# Altium PCB PCB_TEST_ADAPTER.PcbDoc (part 2 of 2)
Units mil, origin at the board's own origin, x right, y up, seen from the top; angles counter-clockwise.
Board outline 9448.82 x 5511.81 mil, 4 copper layers (Top Layer, Internal Plane 1, Internal Plane 2, Bottom Layer), stack 30.635 mil thick; 309 components, 242 nets, 1237 pads, 252 vias.
Unrouted connection lines stored in the file: 662.
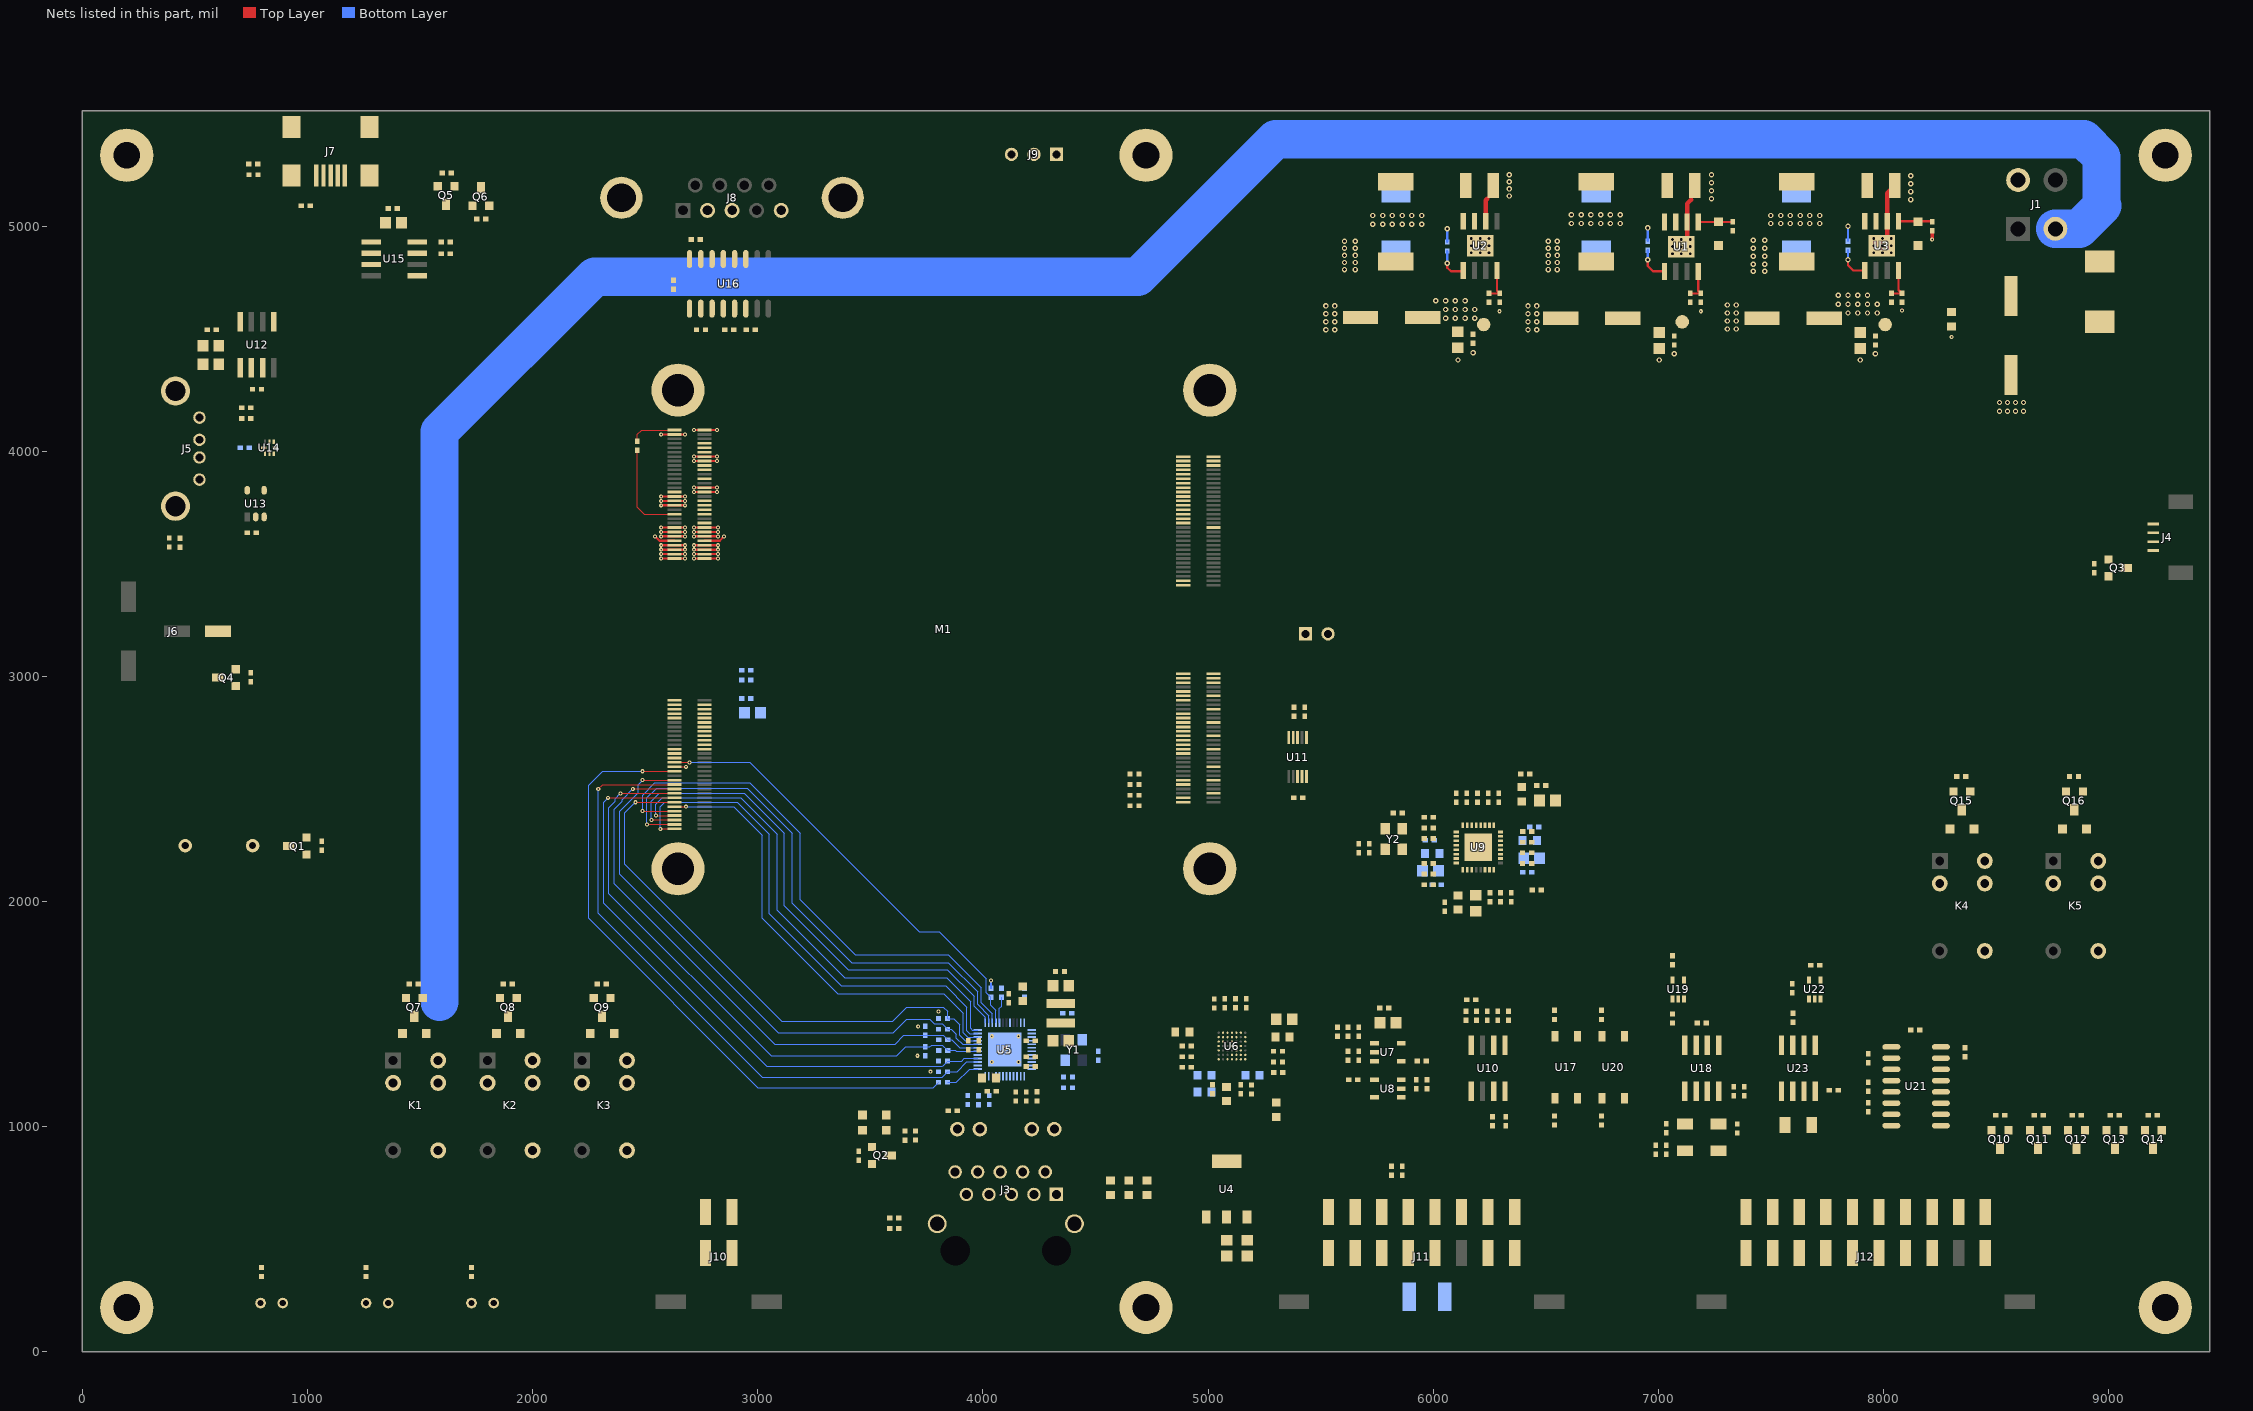
[diagram p4: the nets of this part, all layers, seen from the top]

## Part data
C1 C5 C11 C18: library part "CAP WP"
C2 C3 C4 C6 C7 C8 C9 C10 C12 C13 C14 C15 C16 C17 C19 C21 C22 C23 C24 C25 C26 C27 C28 C29 C30 C31 C32 C33 C34 C35 C36 C37 C38 C39 C40 C41 C42 C43 C44 C45 C46 C47 C48 C49 C50 C51 C52 C53 C54 C55 C56 C57 C58 C59 C60 C61 C62 C63 C64 C65 C66 C67 C68 C69 C70 C73 C75 C76 C77 C78 C79 C80 C81: library part Cap, "Capacitor"
C20 C82 C85 C86 C87: library part CAP_Dup1
C71 C72 C74 C88 C89 C90 C91 C92 C99 C102 C103 C104 C105: library part CAP
C93 C94 C95 C96 C97 C98 C100 C101 C106: library part "P_CAP NP"
D1 D2 D3 D4 D5 D6 D10 D11 D12 D13 D14 D15 D16: library part "Diode 11DQ03", "Schottky Rectifier"
D7 D8 D9: library part LN01401_1
J1 J4 J10: library part "Header 4", "Header, 4-Pin"
J2 J6: library part "Header 2", "Header, 2-Pin"
J5: library part "Header 6", "Header, 6-Pin"
J7: library part FOX_UH51543-JS7
J8: library part "D Connector 9", "Receptacle Assembly, 9 Position, Right Angle"
J9: library part "Header 3", "Header, 3-Pin"
J11: library part "Header 8X2", "Header, 8-Pin, Dual row"
J12: "Header, 10-Pin, Dual row"
K1 K2 K3 K4 K5: library part G5V-1_0
L1 L2 L3: library part 4.7UH_CDH2D09BNP-4R7MC_0.7A_20%
L4 L6 L7 L8 L9 L10 L11 L12: library part Inductor, "Inductor"
L5: library part INDUCTOR, "IND PWR 4.7UH@1MHZ 1A 20% SMD"
Q1 Q2 Q3 Q4 Q6 Q7 Q8 Q9 Q10 Q11 Q12 Q13 Q14 Q15 Q16: library part MOSFET-N, "N-Channel MOSFET"
Q5: library part AO3401L_SOT23-3_0
R1 R2 R3 R4 R5 R6 R7 R8 R9 R17 R19 R21 R22 R55 R91 R98 R99 R100 R101 R102 R108 R109 R112 R113 R114 R115 R116 R117 R118 R120: library part Res3, "Resistor"
R10 R11 R14 R15 R16 R18 R20 R24 R25 R26 R27 R28 R29 R30 R31 R32 R33 R34 R35 R36 R37 R38 R39 R40 R41 R42 R43 R44 R45 R46 R47 R48 R49 R50 R51 R52 R53 R54 R56 R57 R58 R59 R60 R61 R62 R63 R64 R65 R66 R67 R68 R71 R72 R73 R75 R77 R78 R79 R80 R81 R82 R83 R84 R85 R86 R87 R88 R90 R92 R93 R94 R95 R96 R97 R119 R121: library part CR16-1003FM
R69 R70 R74 R76 R110 R111: library part R
R103 R104 R105 R106 R107: library part P_R
U1 U2 U3: library part LM22670_0
U4: library part LD1117AS18, "IC VREG LDO 1.8V 1A 10V SOT-223"
U5: library part AR8031_QFN48, "IC XCVR ETHERNET PHY 10/100/1000G-BIT 3.3V QFN48"
U6: library part WM8962_BGA_49P_CUST, "IC AUDIO CODEC 24BIT DAC 2 CH ADC 1.8V BGA49"
U7 U8: "Single 30V High Output Current and Unlimited Capacitive Load Op Amp"
U12 U15: library part MIC2526_8P, "IC LIN SW PWR ACTIVE HIGH DUAL 2.7V-5.5V 0.5A SOIC8"
U13: library part 74LVC1G04GW_SOT353-5
U16 U21: library part MAX3232
U17 U20: library part Optoisolator1, "4-Pin Phototransistor Optocoupler"
U18: library part TJA1040T_SO_8P, "IC XCVR CAN HS 5V SO8"
U23: library part MAX485
Y1: library part XTAL_13Y, "XTAL 25MHZ -- -- SMT"
Y2: library part CRYSTAL_JXS63, "XTAL 28.63636MHZ 10PF RSN -- SMT"

## Free pads (board coordinates)
  round 236.22 hole 118.11: MT1(196.85,5314.96) MT2(4724.41,5314.96) MT3(9251.97,5314.96) MT4(9251.97,196.85) MT5(4724.41,196.85) MT6(196.85,196.85)
  round 60 smd paste-30: ""(6224.41,4562.99) ""(7106.3,4574.8) ""(8007.87,4562.99)

## Via types
v1: diameter 24, hole 12, Top Layer to Bottom Layer, tented both sides, 174 vias
v2: diameter 18, hole 8, Top Layer to Bottom Layer, tented both sides, 78 vias

## Nets (pads, with @x,y where several pads share a name; then routed paths per layer and width w, separated by ;. In a path a pad name is that pad's centre, name@x,y a point inside that pad or via, vN(x,y) a via of type N, cw(c..) or ccw(c..) an arc to the next point about the centre after c; other vN are vias at no path point)
2V5-RGMII: C23.1 R38.2 R39.2 U5.10
12V-DET: J11.8 R87.2 R120.1
ACC-INPUT: J10.4 K3.6
ADV7390-RST: M1.B30 U9.14
AGND1: C40.1 C41.2 C46.1 C48.1 C49.1 C55.1 C56.1 C57.1 J4.4 J11.2 J11.4 J11.6 L8.2 R51.2 R52.2 R54.1 U6.B1 U6.B4 U6.C1 U6.C7 U6.D7 U7.5 U8.5
AUD3-RXD: M1.D27 R59.2
AUD3-TXC: M1.D21 R56.2
AUD3-TXD: M1.D23 R58.2
AUD3-TXFS: M1.D25 R57.2
AUD-AUX-OUT1: C52.2 J11.3
AUD-AUX-OUT2: C53.2 J11.5
AUD-MAIN-OUT: C51.2 J11.1
AUD-MCLK: M1.D32 R60.2
AUD-TST-OUT: C44.1 J4.3 J11.9
BELL: M1.D37 Q1.2 R21.1
BM-SEL: J2.1 M1.B2
CAMERA1: J11.7 R76.2
CAMERA2: J11.11 R74.2
CAN-RX: M1.A50 U19.4
CAN-STBY: M1.A52 R106.1
CAN-TX: M1.A48 U18.1
CAN_N: C97.1 J12.4 R105.2 U18.6
CAN_P: C93.2 J12.2 R103.1 U18.7
CLK: U9.13 Y2.3
CPU-3V3: C10.2 C11.1 C12.2 L2.2 M1.D1 M1.D2 M1.D3 M1.D4 M1.D5 M1.D6 M1.D7 M1.D8 pad.@6224.41,4562.99 R4.2 | length 850.4
  Top Layer w10: v2(2570.87,3523.62) M1.D2@2629.92,3523.62 v2(2677.17,3523.62) ; v2(2570.87,3543.31) M1.D4@2629.92,3543.31 v2(2677.17,3543.31) ; v2(2570.87,3562.99) M1.D6@2629.92,3562.99 v2(2677.17,3562.99) ; v2(2570.87,3582.68) M1.D8@2629.92,3582.68 v2(2677.17,3582.68) ; v2(2716.54,3523.62) M1.D1@2763.78,3523.62 v2(2822.83,3523.62) ; v2(2716.54,3543.31) M1.D3@2763.78,3543.31 v2(2822.83,3543.31) ; v2(2716.54,3562.99) M1.D5@2763.78,3562.99 v2(2822.83,3562.99) ; v2(2716.54,3582.68) M1.D7@2763.78,3582.68 v2(2822.83,3582.68)
  other v1: 6055.12,4590.55 6098.43,4590.55 6141.73,4590.55 6185.04,4590.55 6055.12,4629.92 6098.43,4629.92 6141.73,4629.92 6185.04,4629.92 6011.81,4669.29 6055.12,4669.29 6098.43,4669.29 6141.73,4669.29
DVDDL-RGMII: C26.1 C27.1 L5.2 L6.1 R25.2 U5.47
ENET-REF-CLK: M1.C28 R33.1 | length 2874.5
  Top Layer w4.7: v2(2488.19,2578.74) M1.C28@2629.92,2578.74
  Bottom Layer w4.7: v2(2488.19,2578.74) 2311.02,2578.74 2248.03,2515.75 2248.03,1925.2 3000,1173.23 3779.09,1173.23 R33.1@3802.71,1196.85
ETH-SH-GND: C37.2 J3.SH1 J3.SH2 R32.1
ETH-VDDIO-REG: C21.1 C22.1 M1.C37 R36.2 R37.2 U5.29
ETH-WOL-INT: M1.C32 R27.1 U5.40 | length 1996.4
  Top Layer w4.7: M1.C32@2629.92,2618.11 v2(2696.85,2618.11)
  Bottom Layer w4.7: v2(2696.85,2618.11) 2964.57,2618.11 3716.54,1866.14 3807.09,1866.14 4015.75,1657.48 4015.75,1594.05 R27.1@4035.43,1574.36 4035.43,1539.37 4057.58,1517.23 U5.40@4057.58,1462.11
ETH_AVDDL: C30.1 C31.1 C32.1 C33.1 L6.2 U5.8 U5.13 U5.19 U5.44
GND: C1.2 C2.2 C4.2 C5.2 C6.1 C7.1 C9.2 C10.1 C11.2 C12.1 C14.2 C15.2 C16.2 C17.1 C18.2 C19.1 C20.2 C21.2 C22.2 C23.2 C24.2 C25.2 C26.2 C27.2 C28.2 C29.2 C30.2 C31.2 C32.2 C33.2 C34.2 C35.2 C36.2 C37.1 C38.2 C39.2 C42.1 C47.1 C50.1 C58.2 C59.2 C60.2 C61.2 C63.2 C64.2 C65.2 C68.2 C69.2 C76.2 C77.2 C78.2 C79.2 C80.2 C81.2 C82.1 C85.1 C86.2 C87.2 C88.2 C90.2 C91.2 C93.1 C94.2 C95.2 C96.2 C97.2 C98.2 C99.2 C100.2 C101.2 C103.2 C104.2 C106.1 D2.1 D4.1 D5.1 J1.2 J2.2 J3.1 J3.14 J4.2 J5.4 J7.5 J8.5 J8.10 J8.11 J9.3 J10.1 J11.16 J12.9 J12.10 J12.16 J12.20 L8.1 M1.A5 M1.A11 M1.A17 M1.A25 M1.A31 M1.A37 M1.A43 M1.A49 M1.A55 M1.A56 M1.A57 M1.A58 M1.A59 M1.A60 M1.B27 M1.B55 M1.B56 M1.B57 M1.B58 M1.B59 M1.B60 M1.C47 M1.C52 M1.C53 M1.C54 M1.C56 M1.D26 M1.D28 M1.D30 M1.D31 M1.D33 M1.D45 M1.D47 M1.D58 M1.D59 M1.MT7 M1.MT8 M1.MT9 M1.MT10 pad.MT1 pad.MT2 pad.MT3 pad.MT4 pad.MT5 pad.MT6 Q1.3 Q2.3 Q3.3 Q4.3 Q6.3 Q7.3 Q8.3 Q9.3 Q10.3 Q11.3 Q12.3 Q13.3 Q14.3 Q15.3 Q16.3 R1.2 R3.2 R5.2 R6.2 R8.2 R18.2 R21.2 R32.2 R34.1 R35.1 R40.1 R41.1 R42.1 R43.1 R44.1 R45.1 R46.1 R47.1 R55.2 R61.2 R62.2 R64.2 R65.2 R66.2 R67.2 R68.2 R71.2 R77.2 R81.1 R82.2 R84.2 R86.1 R88.2 R90.2 R91.2 R93.1 R95.2 R97.1 R98.2 R99.2 R100.2 R107.2 R111.2 R112.2 R113.2 R114.2 R115.2 R116.2 R117.2 R118.2 R119.2 R120.2 U1.6 U1.9 U2.6 U2.9 U3.6 U3.9 U4.1 U5.49 U6.F2 U6.F3 U6.G5 U9.6 U9.15 U9.29 U9.32 U11.3 U12.1 U12.6 U13.3 U14.4 U15.1 U15.6 U16.15 U17.3 U18.2 U19.3 U20.3 U21.15 U22.3 U23.5 Y2.2 | length 1599.2
  Top Layer w10: v2@2570.87,3759.84 M1.D26@2629.92,3759.84 v2@2677.16,3759.84 ; v2(2570.87,3779.53) M1.D28@2629.92,3779.53 v2(2677.17,3779.53) ; v2(2570.87,3799.21) M1.D30@2629.92,3799.21 v2(2677.17,3799.21) ; v2(2570.87,4074.8) M1.D58@2629.92,4074.8 v2(2677.17,4074.8) ; v2(2716.54,3818.9) M1.D31@2763.78,3818.9 v2(2818.9,3818.9) ; v2(2716.54,3838.58) M1.D33@2763.78,3838.58 v2(2818.9,3838.58) ; v2(2716.54,3956.69) M1.D45@2763.78,3956.69 v2(2818.9,3956.69) ; v2(2716.54,3976.38) M1.D47@2763.78,3976.38 v2(2818.9,3976.38) ; v2(2716.54,4094.49) M1.D59@2763.78,4094.49 v2(2818.9,4094.49)
  Top Layer w15: v2(8216.54,4940.94) R8.2@8216.54,4980.13
  Top Layer w20: U2.6@6233.86,5022.05 6233.86,5115.75 6240.16,5122.05 ; v1(7102.36,4908.66) 7127.56,4933.86 U1.6@7127.56,5018.11 7127.56,5100 7145.67,5118.11 ; U3.9@7992.13,4912.6 8017.32,4937.8 U3.6@8017.32,5022.05 8017.32,5147.24 C14.2@8051.18,5181.1
  other v1: 8515.75,4177.17 8551.18,4177.17 8586.61,4177.17 8622.05,4177.17 8515.75,4216.54 8551.18,4216.54 8586.61,4216.54 8622.05,4216.54 6110.24,4405.51 7003.94,4405.51 7897.64,4405.51 7070.87,4433.07 7964.57,4433.07 6177.17,4437.01 5523.62,4539.37 5562.99,4539.37 6421.26,4539.37 6460.63,4539.37 7307.09,4543.31 7346.46,4543.31 5523.62,4574.8 5562.99,4574.8 6421.26,4574.8 6460.63,4574.8 7307.09,4578.74 7346.46,4578.74 5523.62,4610.24 5562.99,4610.24 6421.26,4610.24 6460.63,4610.24 7307.09,4614.17 7346.46,4614.17 5523.62,4645.67 5562.99,4645.67 6421.26,4645.67 6460.63,4645.67 7307.09,4649.61 7346.46,4649.61 7421.26,4799.21 7472.44,4799.21 5606.3,4807.09 5653.54,4807.09 6511.81,4807.09 6551.18,4807.09 7421.26,4830.71 7472.44,4830.71 5606.3,4838.58 5653.54,4838.58 6511.81,4838.58 6551.18,4838.58 7421.26,4866.14 7472.44,4866.14 5606.3,4870.08 5653.54,4870.08 6511.81,4870.08 6551.18,4870.08 7062.99,4877.95 7102.36,4877.95 7141.73,4877.95 6169.29,4881.89 6208.66,4881.89 6248.03,4881.89 7956.69,4881.89 7996.06,4881.89 8035.43,4881.89 5606.3,4901.57 5653.54,4901.57 6511.81,4901.57 6551.18,4901.57 7421.26,4901.57 7472.44,4901.57 7062.99,4909.45 7141.73,4909.45 6208.66,4912.6 6169.29,4913.39 6248.03,4913.39 7956.69,4913.39 7996.06,4913.39 8035.43,4913.39 5606.3,4933.07 5653.54,4933.07 6511.81,4933.07 6551.18,4933.07 7421.26,4937.01 7472.44,4937.01 7062.99,4940.94 7102.36,4940.94 7141.73,4940.94 6169.29,4944.88 6208.66,4944.88 6248.03,4944.88 7956.69,4944.88 7996.06,4944.88 8035.43,4944.88 8122.05,5118.11 7236.22,5122.05 6338.58,5133.86 8122.05,5153.54 7236.22,5157.48 6338.58,5165.35 8122.05,5188.98 7236.22,5192.91 6338.58,5196.85 8122.05,5224.41 6338.58,5228.35 7236.22,5228.35
  other v2: 3767.72,1244.09 4039.37,1287.4 4157.48,1287.4 3708.66,1314.96 4098.43,1346.46 4039.37,1401.57 4157.48,1401.57 3712.6,1444.88 3803.15,1511.81 2570.87,3759.84 2677.17,3759.84 8303.15,4507.87 6295.28,4622.05 7188.98,4622.05 8082.68,4625.98
HOST-VBUS: C79.1 C80.1 J5.1 R85.2 R119.1 U12.5
I2C1-SCL: M1.A4 R11.1 U6.F1 U9.12
I2C1-SDA: M1.A2 R10.1 U6.E2 U9.11
I2C2-SCL: M1.A12 R15.1 U11.10
I2C2-SDA: M1.A10 R14.1 U11.9
LED1: D7.2 M1.B50
LED2: D8.2 M1.B52
LED3: D9.2 M1.B54
LINK-LED: J3.12 Q2.1
MAINPWR: C1.1 C2.1 C4.1 C9.1 C14.1 D1.2 U1.7 U2.7 U3.7
MR: J4.1 Q3.1
NetC3_1: C3.1 D2.2 L1.1 U1.8 | length 58.6
  Bottom Layer w10: C3.1@6952.76,4933.51 v1(6952.76,4992.13)
  other v1: 6614.17,5011.81 6657.48,5011.81 6700.79,5011.81 6744.09,5011.81 6787.4,5011.81 6830.71,5011.81 6614.17,5051.18 6657.48,5051.18 6700.79,5051.18 6744.09,5051.18 6787.4,5051.18 6830.71,5051.18
NetC3_2: C3.2 U1.1 | length 155.3
  Top Layer w10: v1(6952.76,4850.39) 6952.76,4822.83 6976.38,4799.21 U1.1@7027.56,4799.21
  Bottom Layer w10: v1(6952.76,4850.39) C3.2@6952.76,4893.51
NetC8_1: C8.1 D4.2 L2.1 U2.8 | length 58.6
  Bottom Layer w10: C8.1@6062.99,4929.57 v1(6062.99,4988.19)
  other v1: 5732.28,5007.87 5775.59,5007.87 5818.9,5007.87 5862.2,5007.87 5905.51,5007.87 5948.82,5007.87 5732.28,5047.24 5775.59,5047.24 5818.9,5047.24 5862.2,5047.24 5905.51,5047.24 5948.82,5047.24
NetC8_2: C8.2 U2.1 | length 153.6
  Top Layer w10: v1(6062.99,4834.65) 6062.99,4814.96 6078.74,4799.21 6129.92,4799.21 U2.1@6133.86,4803.15
  Bottom Layer w10: v1(6062.99,4834.65) C8.2@6062.99,4889.57
NetC13_1: C13.1 D5.2 L3.1 U3.8 | length 66.5
  Bottom Layer w10: C13.1@7842.52,4933.51 v1(7842.52,5000)
  other v1: 7500,5011.81 7543.31,5011.81 7586.61,5011.81 7629.92,5011.81 7673.23,5011.81 7716.54,5011.81 7500,5047.24 7543.31,5047.24 7586.61,5047.24 7629.92,5047.24 7673.23,5047.24 7716.54,5047.24
NetC13_2: C13.2 U3.1 | length 151.3
  Top Layer w10: v1(7842.52,4850.39) 7842.52,4826.77 7866.14,4803.15 U3.1@7917.32,4803.15
  Bottom Layer w10: v1(7842.52,4850.39) C13.2@7842.52,4893.51
NetC24_1: C24.1 C25.1 L4.2 U5.16
NetC34_1: C34.1 C35.1 C36.1 J3.6
NetC38_1: C38.1 U5.6 Y1.1
NetC39_1: C39.1 U5.7 Y1.3
NetC41_1: C41.1 R48.1 R53.1 U7.2 U8.2
NetC43_1: C43.1 R49.1
NetC43_2: C43.2 C45.2 R51.1 U6.B5
NetC44_2: C44.2 U7.1 U7.4
NetC45_1: C45.1 R52.1
NetC48_2: C48.2 L7.2 U6.D6
NetC51_1: C51.1 U6.C4
NetC52_1: C52.1 U6.D4
NetC53_1: C53.1 U6.E7
NetC54_1: C54.1 U6.B7
NetC54_2: C54.2 U6.B6
NetC55_2: C55.2 U6.A6
NetC56_2: C56.2 U6.A7
NetC57_2: C57.2 U6.C5
NetC70_2: C70.2 U9.23
NetC71_1: C71.1 C72.1 R72.2 U9.22
NetC71_2: C71.2 R70.1 U10.1
NetC72_2: C72.2 R69.1 U10.2
NetC73_1: C73.1 C75.1 U9.16
NetC75_2: C75.2 R78.2
NetC89_1: C89.1 U16.1
NetC89_2: C89.2 U16.3
NetC90_1: C90.1 U16.2
NetC91_1: C91.1 U16.6
NetC92_1: C92.1 U16.4
NetC92_2: C92.2 U16.5
NetC98_1: C98.1 R103.2 R104.1 R105.1
NetC102_1: C102.1 U21.1
NetC102_2: C102.2 U21.3
NetC103_1: C103.1 U21.2
NetC104_1: C104.1 U21.6
NetC105_1: C105.1 U21.4
NetC105_2: C105.2 U21.5
NetD3_2: D3.2 R5.1 U1.5 | length 154
  Top Layer w10: U1.5@7177.56,5018.11 7328.69,5018.11 R5.1@7330.71,5020.13
NetD6_2: D6.2 R8.1 U3.5 | length 150
  Top Layer w10: U3.5@8067.32,5022.05 8214.61,5022.05 R8.1@8216.54,5020.13
NetD7_1: D7.1 R17.2
NetD8_1: D8.1 R19.2
NetD9_1: D9.1 R22.2
NetD10_2: D10.2 D11.2 Q2.2 R34.2
NetD12_1: D12.1 K1.2 Q7.1
NetD13_1: D13.1 K2.2 Q8.1
NetD14_1: D14.1 K3.2 Q9.1
NetD15_1: D15.1 K4.2 Q15.1
NetD16_1: D16.1 K5.2 Q16.1
NetJ3_11: J3.11 R26.2
NetJ3_13: J3.13 R24.2
NetJ6_1: J6.1 Q4.1
NetL5_1: L5.1 U5.3
NetLS1_2: LS1.2 Q1.1
NetQ4_2: Q4.2 R91.1
NetQ5_1: Q5.1 Q6.1 R92.1
NetR1_1: R1.1 R2.1 U1.4 | length 150
  Top Layer w10: R2.1@7141.73,4701.23 R1.1@7188.98,4701.23 7177.56,4712.65 U1.4@7177.56,4799.21
NetR3_1: R3.1 R4.1 U2.4 | length 153.9
  Top Layer w10: R4.1@6248.03,4701.23 R3.1@6295.28,4701.23 6283.86,4712.65 U2.4@6283.86,4803.15
NetR6_1: R6.1 R7.1 U3.4 | length 155.5
  Top Layer w10: R7.1@8035.43,4701.23 R6.1@8082.68,4701.23 8067.32,4716.58 U3.4@8067.32,4803.15
NetR25_1: R25.1 U5.41 | length 116.1
  Bottom Layer w4.7: U5.41@4073.33,1462.11 4073.33,1526.08 4082.68,1535.43 R25.1@4082.68,1574.36
NetR29_1: R29.1 R31.2 U5.2
NetR33_2: R33.2 U5.25 | length 159.1
  Bottom Layer w4.7: R33.2@3842.71,1196.85 3881.89,1196.85 3940.95,1255.91 U5.25@3977.36,1255.91
NetR35_2: R35.2 U5.9
NetR49_2: R49.2 R50.2 U7.3
NetR50_1: R50.1 U8.1 U8.4
NetR53_2: R53.2 R54.2 U8.3
NetR56_1: R56.1 U6.E1
NetR57_1: R57.1 U6.D3
NetR58_1: R58.1 U6.D1
NetR59_1: R59.1 U6.D2
NetR60_1: R60.1 U6.G7
NetR61_1: R61.1 U9.30
NetR62_1: R62.1 U9.31
NetR63_1: R63.1 U9.24
NetR64_1: R64.1 U9.2
NetR65_1: R65.1 U9.3
NetR66_1: R66.1 U9.4
NetR67_1: R67.1 U9.7
NetR68_1: R68.1 U9.8
NetR71_1: R71.1 U9.9
NetR73_1: R73.1 U9.27
NetR74_1: R74.1 U10.8
NetR75_1: R75.1 U9.26
NetR76_1: R76.1 U10.7
NetR77_1: R77.1 R79.1 U9.10
NetR80_2: R80.2 R81.2 Y2.1
NetR83_1: R83.1 R84.1 U11.1
NetR85_1: R85.1 R86.2 U11.4
NetR87_1: R87.1 R88.1 U11.5
NetR101_2: R101.2 U17.1
NetR104_2: R104.2 U18.5
NetR106_2: R106.2 R107.1 U18.8
NetR108_2: R108.2 U20.1
NetU13_4: U13.4 U14.1
NetU18_4: U18.4 U19.2
NetU22_2: U22.2 U23.1
OTG-ID: J7.4 M1.C43 R94.2
OTG-OC: M1.C41 R96.1 U15.3
OTG-PWREN: M1.C39 R97.2 U15.4
OTG-SH-GND: C85.2 J7.6 J7.7 J7.8 J7.9 R95.1
OTG_N: J7.2 M1.C49
OTG_P: J7.3 M1.C51
OTGVBUS: C86.1 C87.1 J7.1 Q5.2 R92.2 U15.5
P1V8: C15.1 C47.2 C49.2 C50.2 C60.1 C68.1 L7.1 L10.1 L12.1 U4.2 U4.4 U6.C6 U6.G2 U6.G4
P2V8-OUT: D3.1 D6.1 M1.D17
P3V3: C16.1 C17.2 C18.1 C19.2 C28.1 C29.1 C42.2 C46.2 C58.1 C66.1 C76.1 C77.1 C81.1 C88.1 C96.1 C99.1 C101.1 L3.2 L4.1 L9.1 L11.1 M1.D9 M1.D10 M1.D11 M1.D12 M1.D13 M1.D14 M1.D15 M1.D16 pad.@8007.87,4562.99 Q6.2 R7.2 R10.2 R11.2 R14.2 R15.2 R16.2 R17.1 R19.1 R22.1 R26.1 R27.2 R28.2 R29.2 R30.2 R48.2 R73.2 R75.2 R79.2 R80.1 R83.2 R93.2 R94.1 R96.2 R101.1 R102.1 R108.1 R109.1 R121.1 U4.3 U5.4 U6.A3 U6.G3 U11.8 U13.5 U14.8 U16.16 U19.5 U21.16 U22.5 Y2.4 | length 862.6
  Top Layer w10: v2(2543.31,3622.05) 2562.99,3602.36 M1.D10@2629.92,3602.36 ; v2(2570.87,3622.05) M1.D12@2629.92,3622.05 v2(2677.17,3622.05) ; v2(2570.87,3641.73) M1.D14@2629.92,3641.73 v2(2677.17,3641.73) ; v2(2570.87,3661.42) M1.D16@2629.92,3661.42 v2(2677.17,3661.42) ; v2(2716.54,3622.05) M1.D11@2763.78,3622.05 v2(2822.83,3622.05) ; v2(2716.54,3641.73) M1.D13@2763.78,3641.73 v2(2822.83,3641.73) ; v2(2716.54,3661.42) M1.D15@2763.78,3661.42 v2(2822.83,3661.42) ; M1.D9@2763.78,3602.36 2830.71,3602.36 v2(2850.39,3622.05)
  Bottom Layer w10: R27.2@4035.43,1614.36 v2(4035.43,1649.61)
  other v1: 7842.52,4614.17 7885.83,4614.17 7929.13,4614.17 7972.44,4614.17 7799.21,4653.54 7842.52,4653.54 7885.83,4653.54 7929.13,4653.54 7972.44,4653.54 7799.21,4692.91 7842.52,4692.91 7885.83,4692.91 7929.13,4692.91
P5V0: C5.1 C6.2 C7.2 C40.2 C78.1 C94.1 C95.1 C100.1 C106.2 D12.2 D13.2 D14.2 D15.2 D16.2 K1.9 K2.9 K3.9 K4.9 K5.9 L1.2 LS1.1 pad.@7106.3,4574.8 R2.2 R20.2 U6.A2 U6.C2 U12.7 U15.7 U18.3 U19.1 U22.1 U23.8
PB1: J12.11 Q10.1
PB2: J12.13 Q11.1
PB3: J12.15 Q12.1
PB4: J12.17 Q13.1
PB5: J12.19 Q14.1
PB-TEST-1: M1.D41 Q10.2 R112.1
PB-TEST-2: M1.D51 Q11.2 R113.1
PB-TEST-3: M1.D43 Q12.2 R114.1
PB-TEST-4: M1.D53 Q13.2 R115.1
PB-TEST-5: M1.D49 Q14.2 R116.1
PMIC-ON-REQ: M1.D22 R9.2 | length 430.2
  Top Layer w4.7: R9.2@2464.57,4003.75 2464.57,3751.97 2496.06,3720.47 M1.D22@2629.92,3720.47
PMIC-PWRON: M1.D60 R9.1 | length 204.6
  Top Layer w4.7: R9.1@2464.57,4043.75 2464.57,4074.8 2484.25,4094.49 M1.D60@2629.92,4094.49
PVDD: C61.1 C65.1 C73.2 L10.2 R78.1 U9.17
PWRIN: D1.1 J1.3 K1.10 K2.10 K3.10 K4.10 K5.10 | length 10953.4
  Bottom Layer w170: 1586.61,1555.12 1586.61,4086.61 2275.59,4775.59 4688.98,4775.59 5299.21,5385.83 8889.76,5385.83 8968.5,5307.09 8968.5,5094.49 8972.44,5090.55 8870.08,4988.19 J1.3@8763.78,4988.19
RESET-TEST: M1.B48 Q3.2 R55.1
REV-SIG: J10.3 K2.6
RGMII-INT: M1.C34 R28.1 U5.5
RGMII-LED-10-100: D10.1 U5.26
RGMII-LED-1000: D11.1 R38.1 R46.2 U5.24
RGMII-LED-ACT: R24.1 R39.1 R47.2 U5.23
RGMII-MDC: M1.C36 U5.1
RGMII-MDIO: M1.C38 R30.1 U5.48
RGMII-NRST: M1.C30 R31.1 | length 51.2
  Top Layer w4.7: M1.C30@2629.92,2598.43 v2(2681.1,2598.43)
RGMII-RXCLK: M1.C14 R44.2 U5.33 | length 2459
  Top Layer w4.7: v2(2456.69,2440.94) M1.C14@2629.92,2440.95
  Bottom Layer w4.7: v2(2456.69,2440.94) 2409.45,2393.7 2409.45,2165.35 3106.3,1468.5 3598.43,1468.5 3661.42,1531.5 3822.83,1531.5 3842.71,1511.62 R44.2@3842.71,1480.32 3870.08,1480.32 3897.64,1452.76 3897.64,1405.51 3921.26,1381.89 U5.33@3977.36,1381.89
RGMII-RXD0: M1.C20 R36.1 R40.2 U5.31 | length 2589.8
  Top Layer w4.7: v2(2444.88,2500) M1.C20@2629.92,2500
  Bottom Layer w4.7: v2(2444.88,2500) 2397.64,2452.76 2397.64,2444.88 2362.2,2409.45 2362.2,2078.74 3074.8,1366.14 3610.24,1366.14 3649.42,1405.32 R40.2@3744.09,1405.32 3823.46,1405.32 R36.1@3842.96,1385.83 3862.2,1385.83 3897.64,1350.39 U5.31@3977.36,1350.39
RGMII-RXD1: M1.C18 R37.1 R41.2 U5.30 | length 2674.4
  Top Layer w4.7: v2(2389.76,2480.32) M1.C18@2629.92,2480.32
  Bottom Layer w4.7: v2(2389.76,2480.32) 2366.14,2456.69 2366.14,2444.88 2338.58,2417.32 2338.58,2035.43 3059.06,1314.96 3618.11,1314.96 3657.67,1354.52 R41.2@3744.09,1354.52 3763.97,1354.52 3771.65,1362.2 3819.34,1362.2 R37.1@3842.96,1338.58 3877.95,1338.58 3881.88,1334.65 U5.30@3977.36,1334.65
RGMII-RXD2: M1.C16 R42.2 U5.28 | length 2749.1
  Top Layer w4.7: v2(2334.65,2460.63) M1.C16@2629.92,2460.63
  Bottom Layer w4.7: v2(2334.65,2460.63) 2314.96,2440.94 2314.96,1992.13 3039.37,1267.72 3818.9,1267.72 3822.83,1271.65 3823.02,1271.65 R42.2@3842.71,1291.34 3905.51,1291.34 3917.33,1303.15 U5.28@3977.36,1303.15
RGMII-RXD3: M1.C22 R43.2 U5.27 | length 2913.4
  Top Layer w4.7: v2(2291.34,2500) 2311.02,2519.69 M1.C22@2629.92,2519.69
  Bottom Layer w4.7: v2(2291.34,2500) 2291.34,1948.82 3019.69,1220.47 3819.09,1220.47 R43.2@3842.71,1244.09 3885.83,1244.09 3929.14,1287.4 U5.27@3977.36,1287.4
RGMII-RXDV: M1.C24 R45.2 U5.32 | length 2564.2
  Top Layer w4.7: v2(2488.19,2539.37) M1.C24@2629.92,2539.37
  Bottom Layer w4.7: v2(2488.19,2539.37) 2468.5,2519.68 2468.5,2484.25 2385.83,2401.57 2385.83,2122.05 3090.55,1417.32 3602.36,1417.32 3661.42,1476.38 3763.78,1476.38 3783.46,1456.69 3819.09,1456.69 R45.2@3842.71,1433.07 3858.27,1433.07 3881.89,1409.45 3881.89,1393.7 3909.45,1366.14 U5.32@3977.36,1366.14
RGMII-TRX0_N: J3.3 U5.12
RGMII-TRX0_P: J3.2 U5.11
RGMII-TRX1_N: J3.5 U5.15
RGMII-TRX1_P: J3.4 U5.14
RGMII-TRX2_N: J3.8 U5.18
RGMII-TRX2_P: J3.7 U5.17
RGMII-TRX3_N: J3.10 U5.21
RGMII-TRX3_P: J3.9 U5.20
RGMII-TXCLK: M1.C2 U5.35 | length 2275.5
  Top Layer w4.7: v2(2566.93,2322.83) M1.C2@2629.92,2322.84
  Bottom Layer w4.7: v2(2566.93,2322.83) 2566.93,2421.26 2586.61,2440.94 2909.45,2440.94 3051.18,2299.21 3051.18,1944.88 3370.08,1625.98 3834.65,1625.98 3929.13,1531.5 3929.13,1425.2 3940.94,1413.39 U5.35@3977.36,1413.39
RGMII-TXD0: M1.C8 U5.36 | length 2270.2
  Top Layer w4.7: v2(2547.24,2381.89) M1.C8@2629.92,2381.89
  Bottom Layer w4.7: v2(2547.24,2381.89) 2547.24,2433.07 2574.8,2460.63 2925.2,2460.63 3086.61,2299.21 3086.61,1960.63 3385.83,1661.42 3838.58,1661.42 3944.88,1555.12 3944.88,1437.01 3952.76,1429.13 U5.36@3977.36,1429.13
RGMII-TXD1: M1.C6 U5.37 | length 2332.6
  Top Layer w4.7: v2(2527.56,2362.2) M1.C6@2629.92,2362.21
  Bottom Layer w4.7: v2(2527.56,2362.2) 2527.56,2444.88 2562.99,2480.32 2940.94,2480.32 3118.11,2303.15 3118.11,1980.32 3401.57,1696.85 3842.52,1696.85 3960.63,1578.74 3960.63,1535.43 4010.34,1485.73 U5.37@4010.34,1462.11
RGMII-TXD2: M1.C4 U5.38 | length 2440.8
  Top Layer w4.7: v2(2507.87,2342.52) M1.C4@2629.92,2342.52
  Bottom Layer w4.7: v2(2507.87,2342.52) 2507.87,2460.63 2551.18,2503.94 2952.76,2503.94 3153.54,2303.15 3153.54,1992.13 3417.32,1728.35 3846.46,1728.35 3976.38,1598.43 3976.38,1543.31 4026.08,1493.61 U5.38@4026.08,1462.11
RGMII-TXD3: M1.C10 U5.39 | length 2465.6
  Top Layer w4.7: v2(2488.19,2401.57) M1.C10@2629.92,2401.58
  Bottom Layer w4.7: v2(2488.19,2401.57) 2488.19,2472.44 2543.31,2527.56 2964.57,2527.56 3188.98,2303.15 3188.98,2007.87 3433.07,1763.78 3846.46,1763.78 3992.13,1618.11 3992.13,1551.18 4041.83,1501.48 U5.39@4041.83,1462.11
RGMII-TXEN: M1.C12 U5.34 | length 2039
  Top Layer w4.7: M1.C12@2629.92,2421.26 v2(2681.1,2421.26)
  Bottom Layer w4.7: v2(2681.1,2421.26) 2893.7,2421.26 3019.68,2295.28 3019.68,1925.2 3354.33,1590.55 3826.77,1590.55 3913.39,1503.94 3913.39,1417.32 3933.06,1397.64 U5.34@3977.36,1397.64
RS232-RX: J8.3 U16.13
RS232-TX: J8.2 U16.14
RS232A-RX: J12.8 U21.13
RS232A-TX: J12.6 U21.14
RS232B-RX: J12.7 U21.8
RS232B-TX: J12.5 U21.7
RS485_N: J12.3 R110.1 U23.7
RS485_P: J12.1 R110.2 U23.6
SWIN-1: J12.12 K4.6
SWIN-2: J12.14 K5.6
SWIN-TST-1: M1.B44 Q15.2 R117.1
SWIN-TST-2: M1.B46 Q16.2 R118.1
SWO1: J11.13 U17.2
SWO2: J11.15 U20.2
SWO-TEST-1: M1.B40 R102.2 U17.4
SWO-TEST-2: M1.B42 R109.2 U20.4
TEST-ACC: M1.B38 Q9.2 R100.1
TEST-PWR-CTL: M1.B34 Q7.2 R98.1
TEST-PWR-OUT: J10.2 K1.6
TEST-REV: M1.B36 Q8.2 R99.1
UART1-RXD: J9.2 M1.A26
UART1-TXD: J9.1 M1.A24
UART2-RTS: M1.B4 R111.1 U23.2 U23.3
UART2-RXD: M1.A30 U22.4
UART2-TXD: M1.A28 U23.4
UART3-RXD: M1.A34 U16.12
UART3-TXD: M1.A32 U16.11
UART4-RXD: M1.A42 U21.12
UART4-TXD: M1.A40 U21.11
UART5-RXD: M1.A38 U21.9
UART5-TXD: M1.A36 U21.10
USB-H1-OC: M1.C57 R16.1 R18.1
USB-H1-VBUS: C20.1 M1.C55 R20.1
USB-HOST_N: M1.C58 U14.5
USB-HOST_P: M1.C60 U14.3
USB-OTG-VBUS: M1.C45 Q5.3
USB-SH-GND: C82.2 J5.5 J5.6 R90.1
USBH-EN: M1.B32 R121.2 U12.4 U13.2
USBHC_N: J5.2 U14.6
USBHC_P: J5.3 U14.2
VAA: C62.1 C67.1 C70.1 C74.1 L11.2 R69.2 R70.2 U9.19 U10.4
VDD1V8: C63.1 C69.1 L12.2 U9.5 U9.28
VDDIO: C59.1 C64.1 L9.2 U9.1
VGND: C62.2 C66.2 C67.2 C74.2 J11.10 J11.14 R63.2 R72.1 R82.1 U9. U9.18 U10.5
pads on no net: J1.1 J1.4 J3. J4. J6. J6.2 J8.1 J8.4 J8.6 J8.7 J8.8 J8.9 J10. J11. J11.12 J12. J12.18 K1.1 K1.5 K2.1 K2.5 K3.1 K3.5 K4.1 K4.5 K5.1 K5.5 M1. M1.A1 M1.A3 M1.A6 M1.A7 M1.A8 M1.A9 M1.A13 M1.A14 M1.A15 M1.A16 M1.A18 M1.A19 M1.A20 M1.A21 M1.A22 M1.A23 M1.A27 M1.A29 M1.A33 M1.A35 M1.A39 M1.A41 M1.A44 M1.A45 M1.A46 M1.A47 M1.A51 M1.A53 M1.A54 M1.B1 M1.B3 M1.B5 M1.B6 M1.B7 M1.B8 M1.B9 M1.B10 M1.B11 M1.B12 M1.B13 M1.B14 M1.B15 M1.B16 M1.B17 M1.B18 M1.B19 M1.B20 M1.B21 M1.B22 M1.B23 M1.B24 M1.B25 M1.B26 M1.B28 M1.B29 M1.B31 M1.B33 M1.B35 M1.B37 M1.B39 M1.B41 M1.B43 M1.B45 M1.B47 M1.B49 M1.B51 M1.B53 M1.C1 M1.C3 M1.C5 M1.C7 M1.C9 M1.C11 M1.C13 M1.C15 M1.C17 M1.C19 M1.C21 M1.C23 M1.C25 M1.C26 M1.C27 M1.C29 M1.C31 M1.C33 M1.C35 M1.C40 M1.C42 M1.C44 M1.C46 M1.C48 M1.C50 M1.C59 M1.D18 M1.D19 M1.D20 M1.D24 M1.D29 M1.D34 M1.D35 M1.D36 M1.D38 M1.D39 M1.D40 M1.D42 M1.D44 M1.D46 M1.D48 M1.D50 M1.D52 M1.D54 M1.D55 M1.D56 M1.D57 U1.2 U1.3 U2.2 U2.3 U2.5 U3.2 U3.3 U5.22 U5.42 U5.43 U5.45 U5.46 U6.A1 U6.A4 U6.A5 U6.B2 U6.B3 U6.C3 U6.D5 U6.E3 U6.E4 U6.E5 U6.E6 U6.F4 U6.F5 U6.F6 U6.F7 U6.G1 U6.G6 U9.20 U9.21 U9.25 U10.3 U10.6 U11.2 U11.6 U11.7 U12.2 U12.3 U12.8 U13.1 U14.7 U15.2 U15.8 U16.7 U16.8 U16.9 U16.10 Y1.2 Y1.4

## Polygon pours and split planes (outlines as drawn)
GND on Bottom Layer "Top Layer-No Net 1" (solid, pour order 24): 5744.09,4952.76 5897.64,4952.76 5968.5,4952.76 5972.44,4952.76 5988.19,4937.01 5988.19,4799.21 5972.44,4783.46 5602.36,4783.46 5586.61,4799.21 5586.61,4937.01 5602.36,4952.76
NetC8_1 on Bottom Layer "Top Layer-No Net 1" (solid, pour order 22): 5775.59,5232.28 5913.39,5232.28 5968.5,5232.28 5996.06,5204.72 5996.06,5007.87 5972.44,4984.25 5708.66,4984.25 5685.04,5007.87 5685.04,5204.72 5712.6,5232.28
GND on Bottom Layer "Top Layer-No Net" (solid, remove dead copper, pour order 22): 7586.61,4956.69 7736.22,4956.69 7755.91,4937.01 7755.91,4799.21 7736.22,4779.53 7413.39,4779.53 7393.7,4799.21 7393.7,4937.01 7413.39,4956.69
NetC13_1 on Bottom Layer "Top Layer-No Net" (solid, remove dead copper, pour order 18): 7523.62,5232.28 7696.85,5232.28 7732.28,5232.28 7740.16,5232.28 7755.91,5216.54 7755.91,5078.74 7755.91,5007.87 7736.22,4988.19 7484.25,4988.19 7464.57,5007.87 7464.57,5216.54 7480.32,5232.28
PWRIN on Bottom Layer "Top Layer-No Net" (solid, remove dead copper, pour order 2): 1503.94,1251.97 1669.29,1251.97 1673.23,1251.97 1673.23,1590.55 1562.99,1590.55 1500,1590.55 1500,1460.63 1500,1251.97
NetC3_1 on Bottom Layer "Top Layer-No Net" (solid, remove dead copper, pour order 15): 6688.98,5232.28 6862.2,5232.28 6881.89,5212.6 6881.89,5003.94 6862.2,4984.25 6582.68,4984.25 6562.99,5003.94 6562.99,5212.6 6582.68,5232.28
GND on Bottom Layer "Top Layer-No Net" (solid, remove dead copper, pour order 21): 6598.43,4952.76 6759.84,4952.76 6866.14,4952.76 6881.89,4937.01 6881.89,4842.52 6881.89,4799.21 6866.14,4783.46 6503.94,4783.46 6488.19,4799.21 6488.19,4937.01 6503.94,4952.76
CPU-3V3 on Top Layer "Top Layer-No Net 1" (solid, pour order 20): 5826.77,4909.45 5874.02,4909.45 5952.76,4909.45 5992.13,4870.08 5992.13,4799.21 5992.13,4775.59 6051.18,4716.54 6055.12,4712.6 6118.11,4712.6 6145.67,4712.6 6181.1,4677.17 6212.6,4677.17 6255.91,4677.17 6263.78,4669.29 6263.78,4515.75 6251.97,4503.94 5854.33,4503.94 5830.71,4527.56 5830.71,4633.86 5724.41,4740.16 5700.79,4763.78 5700.79,4838.58 5700.79,4885.83 5724.41,4909.45
NetC8_1 on Top Layer "Top Layer-No Net 1" (solid, pour order 18): 5787.4,5248.03 5964.57,5248.03 6019.69,5248.03 6043.31,5224.41 6043.31,5114.17 6078.74,5078.74 6082.68,5074.8 6102.36,5074.8 6133.86,5074.8 6145.67,5062.99 6145.67,4980.31 6133.86,4968.5 5692.91,4968.5 5673.23,4988.19 5673.23,5224.41 5696.85,5248.03
P3V3 on Top Layer "Top Layer-No Net" (solid, remove dead copper, pour order 24): 7559.06,4909.45 7692.91,4909.45 7759.84,4909.45 7775.59,4893.7 7779.53,4889.76 7779.53,4799.21 7826.77,4751.97 7850.39,4728.35 7917.32,4728.35 7968.5,4677.17 7972.44,4673.23 8035.43,4673.23 8043.31,4673.23 8051.18,4665.35 8051.18,4511.81 8035.43,4496.06 7649.61,4496.06 7618.11,4527.56 7618.11,4614.17 7507.87,4724.41 7507.87,4893.7 7523.62,4909.45
NetC13_1 on Top Layer "Top Layer-No Net" (solid, remove dead copper, pour order 20): 7531.5,5248.03 7586.61,5248.03 7728.35,5248.03 7736.22,5248.03 7748.03,5236.22 7759.84,5224.41 7759.84,5177.17 7759.84,5129.92 7818.9,5070.87 7822.83,5066.93 7874.02,5066.93 7913.39,5066.93 7921.26,5059.06 7921.26,4984.25 7913.39,4976.38 7480.31,4976.38 7464.57,4992.13 7464.57,5228.35 7484.25,5248.03
GND on Top Layer "Top Layer-No Net" (solid, remove dead copper, pour order 16): 8027.56,5248.03 8145.67,5248.03 8157.48,5236.22 8157.48,5110.24 8145.67,5098.43 8066.93,5098.43 8019.68,5098.43 8007.87,5110.24 8007.87,5236.22 8019.68,5248.03
MAINPWR on Top Layer "Top Layer-No Net" (solid, remove dead copper, pour order 12): 8267.72,4822.83 8299.21,4854.33 8299.21,4988.19 8299.21,5240.16 8263.78,5275.59 8011.81,5275.59 8000,5275.59 7980.32,5255.91 7980.32,5188.98 7980.32,5106.3 7988.19,5098.43 7988.19,4984.25 7988.19,4976.38 7944.88,4976.38 7944.88,5070.87 7925.2,5090.55 7838.58,5090.55 7799.21,5129.92 7787.4,5141.73 7787.4,5185.04 7787.4,5240.16 7751.97,5275.59 7389.76,5275.59 7129.92,5275.59 7098.43,5244.09 7098.43,4972.44 7055.12,4972.44 7055.12,5074.8 7039.37,5090.55 7035.43,5094.49 7011.81,5094.49 6992.13,5094.49 6968.5,5118.11 6964.57,5122.05 6964.57,5208.66 6964.57,5216.54 6905.51,5275.59 6228.35,5275.59 6200.79,5248.03 6200.79,4976.38 6165.35,4976.38 6165.35,5074.8 6149.61,5090.55 6141.73,5098.43 6118.11,5098.43 6098.43,5098.43 6070.87,5125.98 6070.87,5244.09 6070.87,5397.64 6145.67,5472.44 8366.14,5472.44 8472.44,5366.14 8496.06,5342.52 8496.06,5011.81 8496.06,4917.32 8601.45,4811.93 8543.31,4775.59 8251.97,4775.59 8251.97,4807.09
MAINPWR on Top Layer "Top Layer-No Net" (solid, remove dead copper, pour order 10): 8633.86,4881.89 8661.42,4854.33 8661.42,4740.16 8688.98,4712.6 8692.91,4708.66 8763.78,4708.66 9086.61,4708.66 9102.36,4692.91 9102.36,4503.94 9086.61,4488.19 8507.87,4488.19 8409.45,4586.61 8405.51,4590.55 8295.28,4590.55 8263.78,4590.55 8251.97,4602.36 8251.97,4807.09 8267.72,4822.83 8444.88,4822.83 8531.5,4881.89
PWRIN on Top Layer "Top Layer-No Net" (solid, remove dead copper, pour order 8): 8712.6,5074.8 9086.61,5074.8 9102.36,5059.06 9102.36,4751.97 9086.61,4736.22 8708.66,4736.22 8692.91,4751.97 8692.91,5059.06 8708.66,5074.8
GND on Top Layer "Top Layer-No Net" (solid, remove dead copper, pour order 11): 7165.35,5248.03 7232.28,5248.03 7248.03,5248.03 7259.84,5236.22 7259.84,5110.24 7248.03,5098.43 7141.73,5098.43 7125.98,5114.17 7125.98,5232.28 7141.73,5248.03
NetC3_1 on Top Layer "Top Layer-No Net" (solid, remove dead copper, pour order 13): 6685.04,5248.03 6822.83,5248.03 6885.83,5248.03 6929.13,5204.72 6933.07,5200.79 6937.01,5196.85 6937.01,5141.73 6937.01,5110.24 6968.5,5078.74 6976.38,5070.87 7011.81,5070.87 7027.56,5070.87 7039.37,5059.06 7039.37,4976.38 7031.5,4968.5 6574.8,4968.5 6562.99,4980.31 6562.99,5232.28 6578.74,5248.03
P5V0 on Top Layer "Top Layer-No Net" (solid, remove dead copper, pour order 17): 6685.04,4909.45 6834.65,4909.45 6842.52,4909.45 6877.95,4874.02 6881.89,4870.08 6881.89,4799.21 6956.69,4724.41 7003.94,4677.17 7066.93,4677.17 7145.67,4677.17 7149.61,4677.17 7153.54,4673.23 7153.54,4507.87 7141.73,4496.06 6736.22,4496.06 6708.66,4523.62 6708.66,4586.61 6708.66,4622.05 6598.43,4732.28 6598.43,4818.9 6598.43,4893.7 6614.17,4909.45
P5V0 on Top Layer "Top Layer-No Net" (solid, pour order 19): 6952.76,4716.54 7051.18,4716.54 7102.36,4665.35 7102.36,4653.54 6952.76,4653.54
GND on Top Layer "Top Layer-No Net" (solid, remove dead copper, pour order 23): 6271.65,5248.03 6350.39,5248.03 6358.27,5248.03 6374.02,5232.28 6374.02,5122.05 6358.27,5106.3 6244.09,5106.3 6228.35,5122.05 6228.35,5232.28 6244.09,5248.03
GND on Internal Plane 1 (split plane): 9428.72,20.1 20.1,20.1 20.1,5491.71 9428.72,5491.71
CPU-3V3 on Internal Plane 2 (split plane): 6254.74,4484.25 6254.74,3316.12 2469.66,3316.12 2469.66,3597.26 4798.99,3597.26 4798.44,3596.44 4798.05,3594.49 4798.44,3592.54 4799.54,3590.88 4801.2,3589.78 4803.15,3589.39 5807.09,3589.39 5809.04,3589.78 5810.69,3590.88 5811.8,3592.54 5812.18,3594.49 5812.18,4362.2 5812.18,4758.68 6254.74,4758.68
P3V3 on Internal Plane 2 (split plane): 9428.72,20.1 20.1,20.1 20.1,5491.71 9428.72,5491.71

## Keep-outs
Keep-Out Layer:
  the board outline again, w10

## Other copper
Internal Plane 2 (plane layer: these items are gaps in the copper):
  lines w10: 4803.15,3594.49 5807.09,3594.49 5807.09,4362.2 5807.09,4763.78 6259.84,4763.78 6259.84,4484.25 6259.84,3311.02 5059.06,3311.02 ; 5039.37,3594.49 5031.5,3602.36 2464.57,3602.36 2464.57,3311.02 5086.61,3311.02

## Text inside footprints (layer, text, board x,y; h text height)
D7: Top Overlay "+" at 805.12,295.28 h27.56 r180
D8: Top Overlay "+" at 1273.62,295.28 h27.56 r180
D9: Top Overlay "+" at 1742.13,295.28 h27.56 r180
LS1: Top Overlay "+" at 311.02,2224.41 h27.56